# Altium PCB drivers_lvds.PcbDoc (part 1 of 2)
Units mil, origin at the board's own origin, x right, y up, seen from the top; angles counter-clockwise.
Board outline 2600 x 3200 mil, 2 copper layers (Top Layer, Bottom Layer); 42 components, 134 nets, 676 pads, 218 vias.
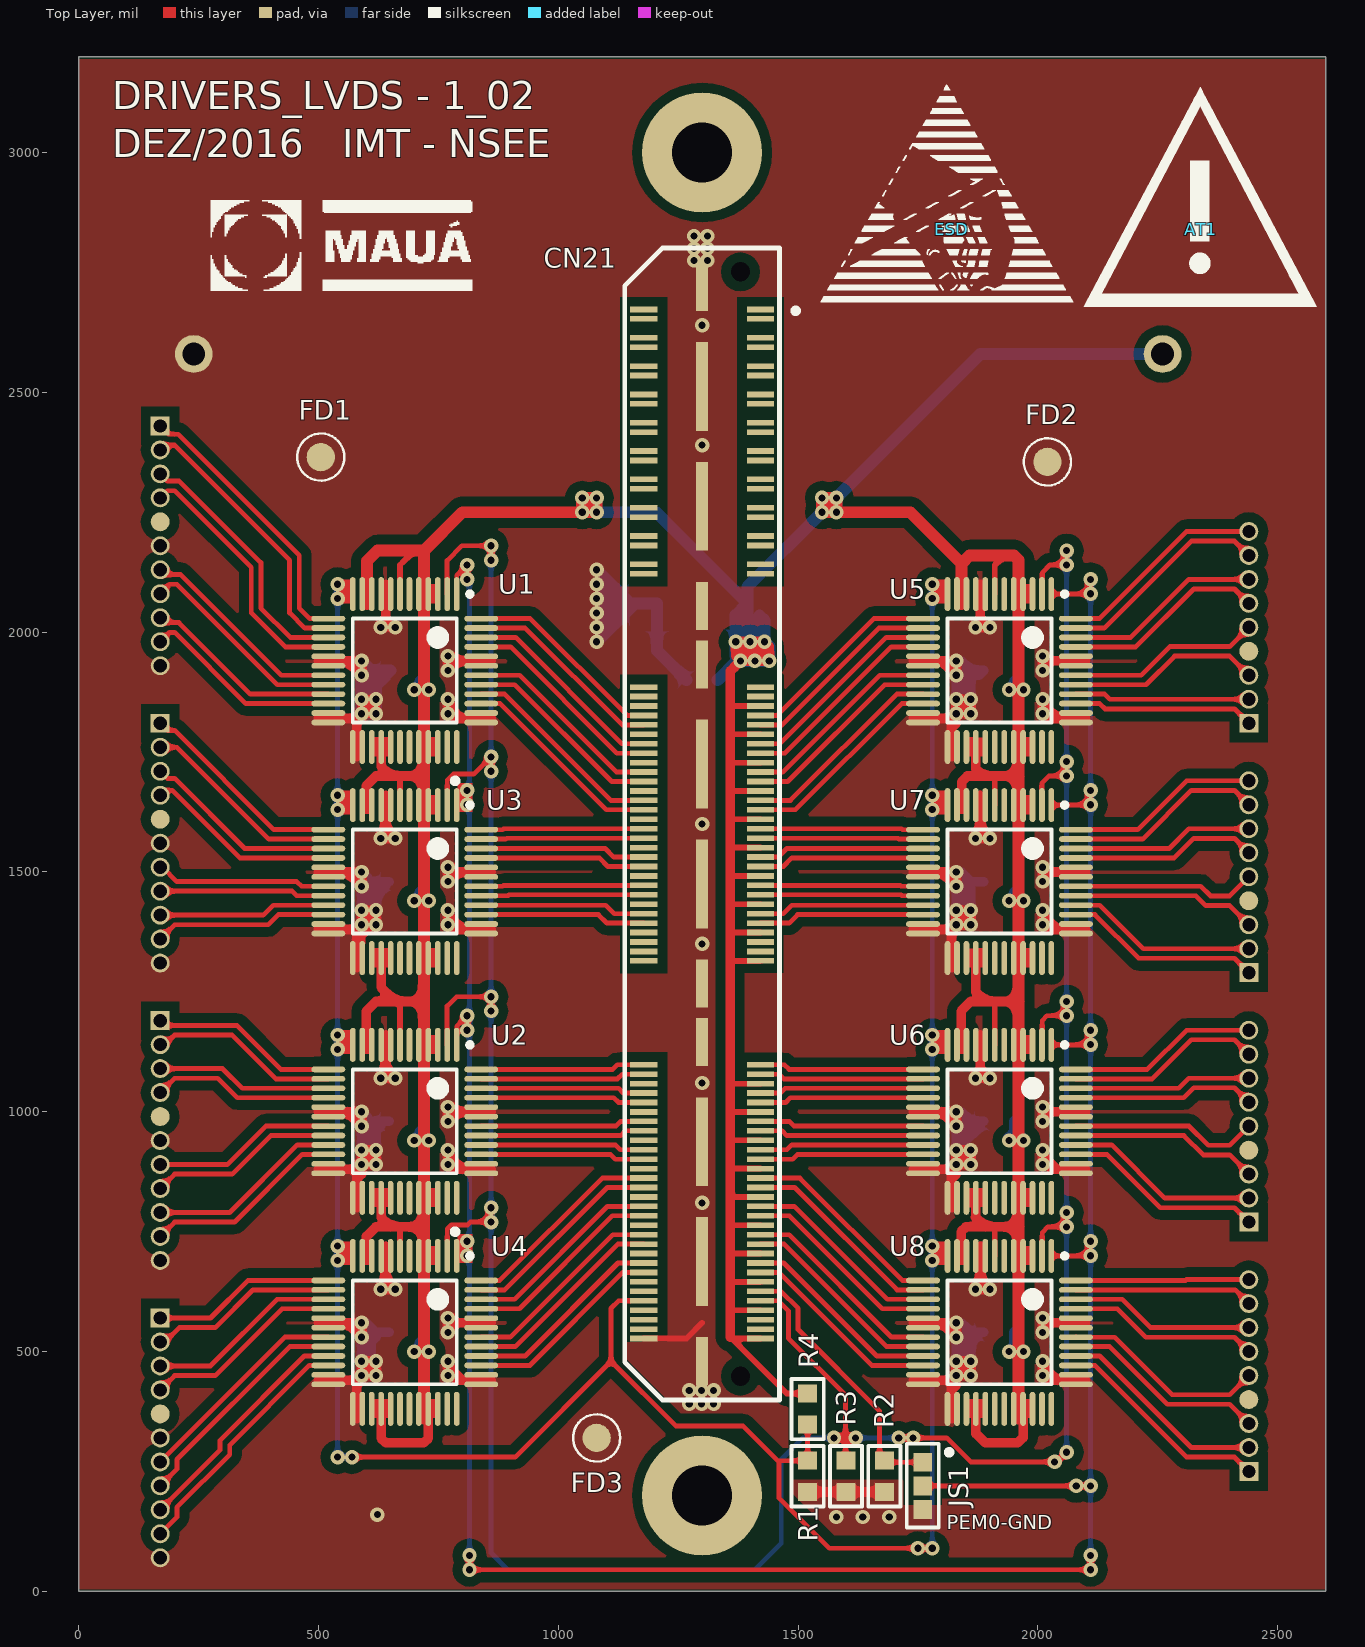
[diagram p0: Top Layer view]
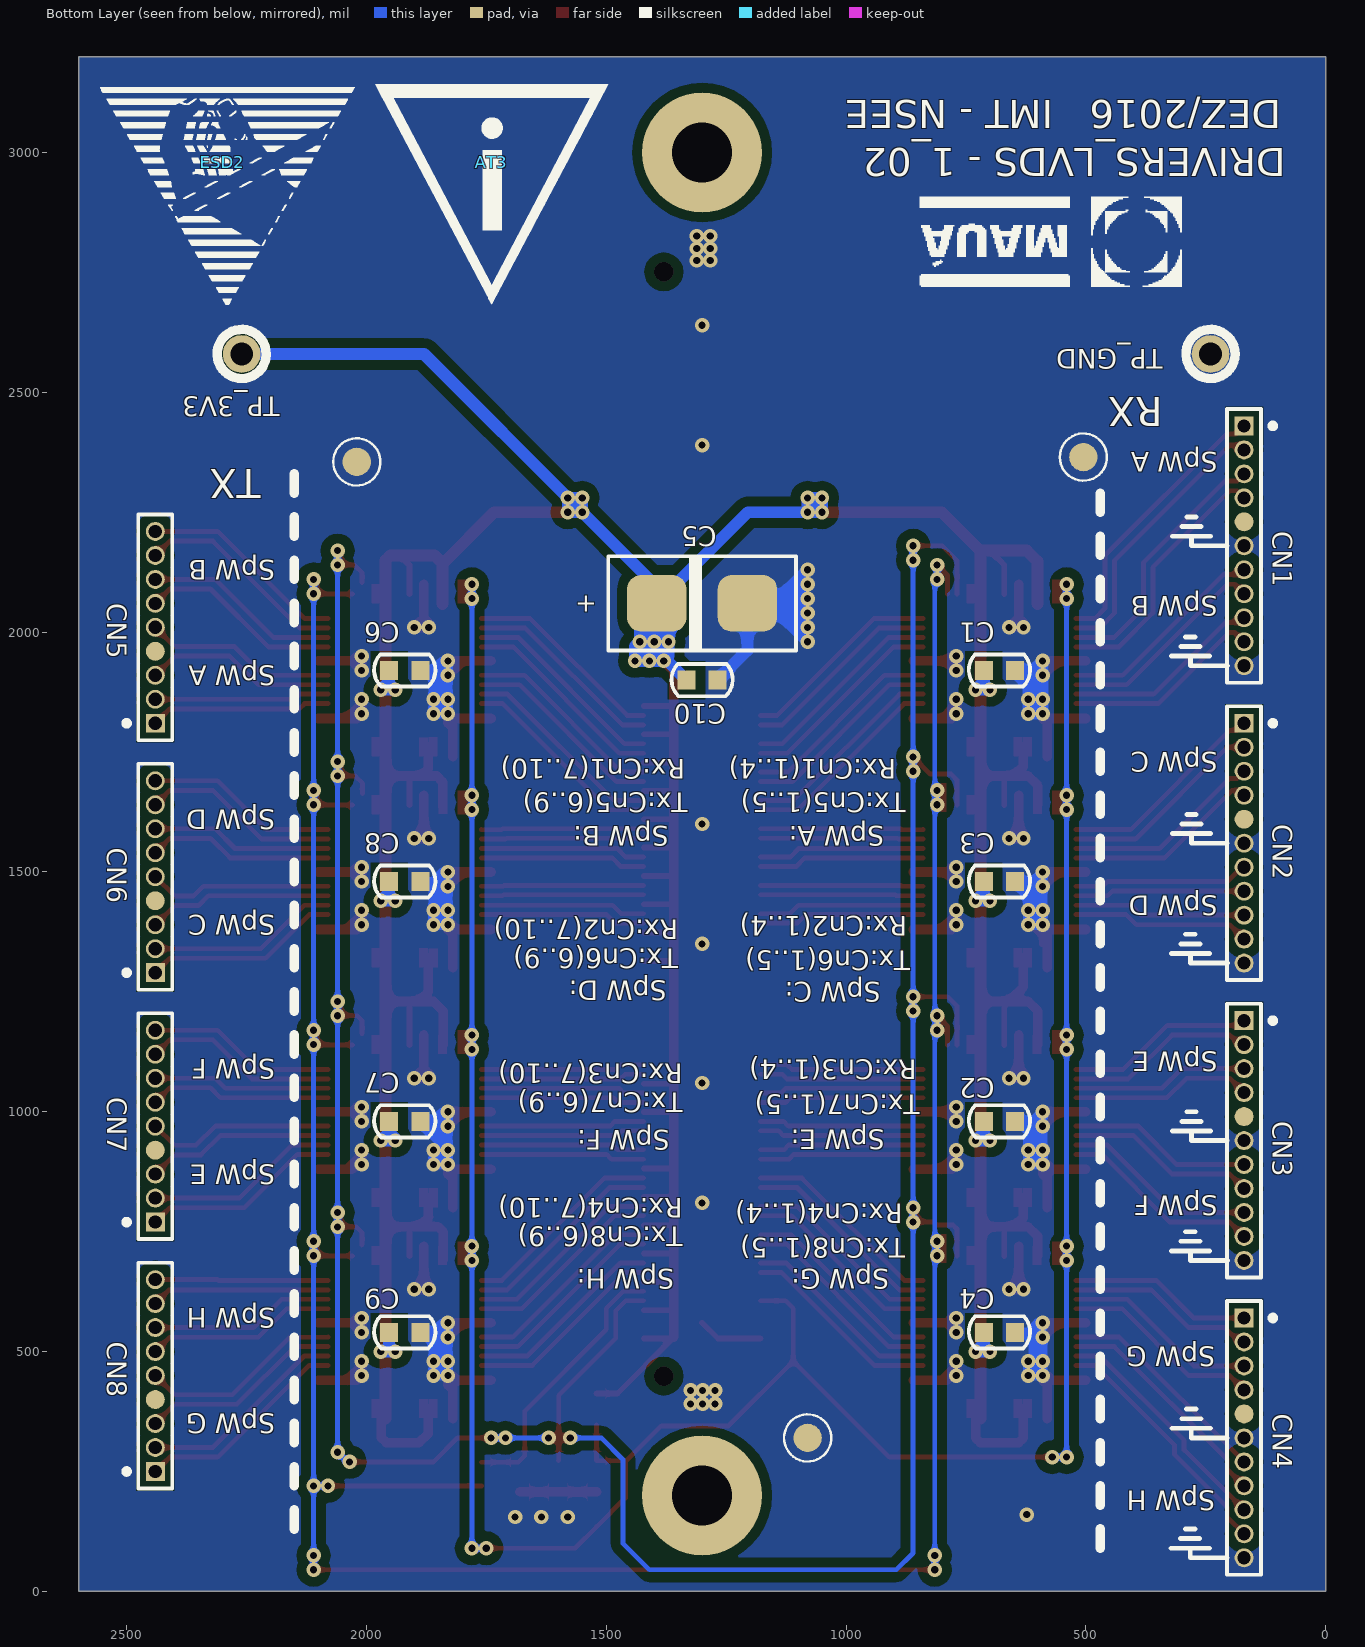
[diagram p1: Bottom Layer view, seen from below]

## Layer stack, top to bottom
Top Solder: solder mask 0.4, Solder Resist, Dk 3.5
Top Layer: signal copper 1.4
Dielectric1: core 12.6, FR-4, Dk 4.8
Bottom Layer: signal copper 1.4
Bottom Solder: solder mask 0.4, Solder Resist, Dk 3.5

## Board outline
0,0 2600,0 2600,3200 0,3200

## Design rules (kind name [scope] priority, off if disabled: settings)
Clearance Clearance_2 [InNamedPolygon('gnd_bottom')] p1: gap=20
Clearance Clearance_1 [InNamedPolygon('gnd_top')] p2: gap=20
Clearance clearance_drivers [((InComponent('JS1'))  Or  HasFootprint('VBC48A_N') Or InComponent('CN21')) Or IsTrack] p3: gap=7
Clearance [All] p4: gap=10
HoleSize [All] p1: absolutevalues=TRUE maxlimit=500 minlimit=0 maxpercent=80.000 minpercent=20.000
MinimumSolderMaskSliver [All] p1: minsoldermaskwidth=0
PolygonConnect PolygonConnect_3 [All vs IsNamedPolygon('gnd_bottom')] p1: connectstyle=Direct reliefconductorwidth=10 reliefentries=4 polygonreliefangle="90 Angle" airgapwidth=10
PolygonConnect PolygonConnect_2 [All vs IsNamedPolygon('gnd_top')] p2: connectstyle=Direct reliefconductorwidth=10 reliefentries=4 polygonreliefangle="90 Angle" airgapwidth=10
PolygonConnect PolygonConnect_1 [All vs IsNamedPolygon('gnd_top')] p3: connectstyle=Direct reliefconductorwidth=10 reliefentries=4 polygonreliefangle="90 Angle" airgapwidth=10
PolygonConnect [All] p4: connectstyle=Relief reliefconductorwidth=10 reliefentries=4 polygonreliefangle="90 Angle" airgapwidth=10
RoutingVias [All] p1: holewidth=15 width=30 viastyle="Through Hole" minholewidth=15 minwidth=30 maxholewidth=15 maxwidth=30
SilkToSilkClearance [All] p1: silktosilkclearance=5
SilkToSolderMaskClearance SilkscreenOverComponentPads [IsPad] p1: minsilkscreentomaskgap=0 clearancetoexposedcopper=TRUE
SolderMaskExpansion [All] p1: expansion=4
Width Width_alim [InNetClass(Alim)] p1: maxlimit=25 minlimit=12 preferedwidth=20
Width [All] p2: maxlimit=25 minlimit=10 preferedwidth=10
26 further rules are at their usual default settings.

## Classes and differential pairs
net class alim: +3V3 GND

## Components (designator, comment, footprint, x,y, rotation, side; value= is the part's Value field where it differs from the comment)
AT1 "##nl" LEIA_DOCUMENTACAO 2340,2840 r0 top
AT3 "##nl" LEIA_DOCUMENTACAO 1740,2980 r0 bottom (schematic designator AT1)
C1 "Capacitor Cerâmico SMD" "0603 - CAP - montagem na maquina" 680,1920 r0 bottom
C2 "Capacitor Cerâmico SMD" "0603 - CAP - montagem na maquina" 680,980 r0 bottom
C3 "Capacitor Cerâmico SMD" "0603 - CAP - montagem na maquina" 680,1480 r0 bottom
C4 "Capacitor Cerâmico SMD" "0603 - CAP - montagem na maquina" 680,540 r0 bottom
C5 "Capacitor de tântalo" CASE-B 1300,2060 r180 bottom
C6 "Capacitor Cerâmico SMD" "0603 - CAP - montagem na maquina" 1920,1920 r0 bottom
C7 "Capacitor Cerâmico SMD" "0603 - CAP - montagem na maquina" 1920,980 r0 bottom
C8 "Capacitor Cerâmico SMD" "0603 - CAP - montagem na maquina" 1920,1480 r0 bottom
C9 "Capacitor Cerâmico SMD" "0603 - CAP - montagem na maquina" 1920,540 r0 bottom
C10 "Capacitor Cerâmico SMD" "0603 - CAP - montagem na maquina" 1300,1900 r0 bottom
CN1 "MHDR1X11" MHDR1X11_Axonn 170,2430 r270 bottom
CN2 "MHDR1X11" MHDR1X11_Axonn 170,1810 r270 bottom
CN3 "MHDR1X11" MHDR1X11_Axonn 170,1190 r270 bottom
CN4 "MHDR1X11" MHDR1X11_Axonn 170,570 r270 bottom
CN5 "MHDR1X9" MHDR1X9_Axonn 2440,1810 r90 bottom
CN6 "MHDR1X9" MHDR1X9_Axonn 2440,1290 r90 bottom
CN7 "MHDR1X9" MHDR1X9_Axonn 2440,770 r90 bottom
CN8 "MHDR1X9" MHDR1X9_Axonn 2440,250 r90 bottom
CN21 "ASP-122952-01" ASP-122952-01 1300,1600 r270 top locked
ESD "##nl" ESTATICA 1820,2840 r0 top
ESD2 "##nl" ESTATICA 2300,2980 r0 bottom (schematic designator ESD)
fab1 "Comment" "TEXTO FABRICACAO" 1300,6040 r0 top
FD1 "##nl" FIDUCIAL 505,2365 r0 top
FD2 "##nl" FIDUCIAL 2020,2355 r0 top
FD3 "##nl" FIDUCIAL 1080,320 r0 top
JS1 "##Obs" "Jumper de solda 3 vias" 1760,220 r270 top
R1 "Res3" "0603 - MONTAGEM MÁQUINA" 1520,240 r90 top
R2 "Res3" "0603 - MONTAGEM MÁQUINA" 1680,240 r90 top
R3 "Res3" "0603 - MONTAGEM MÁQUINA" 1600,240 r90 top
R4 "Res3" "0603 - MONTAGEM MÁQUINA" 1520,380 r90 top
TP_3V3 "Comment" Testpoint 2260,2580 r180 bottom
TP_GND "Comment" Testpoint 240,2580 r180 bottom
U1 "DS90LV004TVS/NOPB" VBC48A_N 680,1920 r270 top
U2 "DS90LV004TVS/NOPB" VBC48A_N 680,980 r270 top
U3 "DS90LV004TVS/NOPB" VBC48A_N 680,1480 r270 top
U4 "DS90LV004TVS/NOPB" VBC48A_N 680,540 r270 top
U5 "DS90LV004TVS/NOPB" VBC48A_N 1920,1920 r270 top
U6 "DS90LV004TVS/NOPB" VBC48A_N 1920,980 r270 top
U7 "DS90LV004TVS/NOPB" VBC48A_N 1920,1480 r270 top
U8 "DS90LV004TVS/NOPB" VBC48A_N 1920,540 r270 top

## Footprints (in the part's own frame and the unit in brackets; to place one, negate y for a bottom-side part, rotate by r counter-clockwise, add the part's x,y. Pads: shape width x height; smd on the part's side, far side on the other; paste and mask are expansions set on the pad)
"0603 - CAP - montagem na maquina" [mm] "Chip Capacitor, 2-Leads, Body 1,6x0,8mm, IPC Medium Density"
  rect 0.95x1 smd: 1(-0.825,0) 2(0.825,0)
  silkscreen extent -1.62,-0.85 1.62,0.85, body extent -0.89,-0.48 0.89,0.48, height 0.6
"0603 - MONTAGEM MÁQUINA" [mm] "Chip Resistor, 2-Leads, Body 1,6x0,8mm, IPC Medium Density"
  rect 0.95x1 smd: 1(-0.825,0) 2(0.825,0)
  silkscreen extent -1.6,-0.85 1.6,0.85, body extent -0.89,-0.48 0.89,0.48, height 0.6
ASP-122952-01 [mm]
  rect 0.3x1.45 smd mask+0.05: 1(-27.25,3.09) 2(-27.25,-3.09) 3(-26.75,3.09) 4(-26.75,-3.09) 5(-25.75,3.09) 6(-25.75,-3.09) 7(-25.25,3.09) 8(-25.25,-3.09) 9(-24.25,3.09) 10(-24.25,-3.09) 11(-23.75,3.09) 12(-23.75,-3.09) 13(-22.75,3.09) 14(-22.75,-3.09) 15(-22.25,3.09) 16(-22.25,-3.09) 17(-21.25,3.09) 18(-21.25,-3.09) 19(-20.75,3.09) 20(-20.75,-3.09) 21(-19.75,3.09) 22(-19.75,-3.09) 23(-19.25,3.09) 24(-19.25,-3.09) 25(-18.25,3.09) 26(-18.25,-3.09) 27(-17.75,3.09) 28(-17.75,-3.09) 29(-16.75,3.09) 30(-16.75,-3.09) 31(-16.25,3.09) 32(-16.25,-3.09) 33(-15.25,3.09) 34(-15.25,-3.09) 35(-14.75,3.09) 36(-14.75,-3.09) 37(-13.75,3.09) 38(-13.75,-3.09) 39(-13.25,3.09) 40(-13.25,-3.09) 41(-7.25,3.09) 42(-7.25,-3.09) 43(-6.75,3.09) 44(-6.75,-3.09) 45(-6.25,3.09) 46(-6.25,-3.09) 47(-5.75,3.09) 48(-5.75,-3.09) 49(-5.25,3.09) 50(-5.25,-3.09) 51(-4.75,3.09) 52(-4.75,-3.09) 53(-4.25,3.09) 54(-4.25,-3.09) 55(-3.75,3.09) 56(-3.75,-3.09) 57(-3.25,3.09) 58(-3.25,-3.09) 59(-2.75,3.09) 60(-2.75,-3.09) 61(-2.25,3.09) 62(-2.25,-3.09) 63(-1.75,3.09) 64(-1.75,-3.09) 65(-1.25,3.09) 66(-1.25,-3.09) 67(-0.75,3.09) 68(-0.75,-3.09) 69(-0.25,3.09) 70(-0.25,-3.09) 71(0.25,3.09) 72(0.25,-3.09) 73(0.75,3.09) 74(0.75,-3.09) 75(1.25,3.09) 76(1.25,-3.09) 77(1.75,3.09) 78(1.75,-3.09) 79(2.25,3.09) 80(2.25,-3.09) 81(2.75,3.09) 82(2.75,-3.09) 83(3.25,3.09) 84(3.25,-3.09) 85(3.75,3.09) 86(3.75,-3.09) 87(4.25,3.09) 88(4.25,-3.09) 89(4.75,3.09) 90(4.75,-3.09) 91(5.25,3.09) 92(5.25,-3.09) 93(5.75,3.09) 94(5.75,-3.09) 95(6.25,3.09) 96(6.25,-3.09) 97(6.75,3.09) 98(6.75,-3.09) 99(7.25,3.09) 100(7.25,-3.09) 101(12.75,3.09) 102(12.75,-3.09) 103(13.25,3.09) 104(13.25,-3.09) 105(13.75,3.09) 106(13.75,-3.09) 107(14.25,3.09) 108(14.25,-3.09) 109(14.75,3.09) 110(14.75,-3.09) 111(15.25,3.09) 112(15.25,-3.09) 113(15.75,3.09) 114(15.75,-3.09) 115(16.25,3.09) 116(16.25,-3.09) 117(16.75,3.09) 118(16.75,-3.09) 119(17.25,3.09) 120(17.25,-3.09) 121(17.75,3.09) 122(17.75,-3.09) 123(18.25,3.09) 124(18.25,-3.09) 125(18.75,3.09) 126(18.75,-3.09) 127(19.25,3.09) 128(19.25,-3.09) 129(19.75,3.09) 130(19.75,-3.09) 131(20.25,3.09) 132(20.25,-3.09) 133(20.75,3.09) 134(20.75,-3.09) 135(21.25,3.09) 136(21.25,-3.09) 137(21.75,3.09) 138(21.75,-3.09) 139(22.25,3.09) 140(22.25,-3.09) 141(22.75,3.09) 142(22.75,-3.09) 143(23.25,3.09) 144(23.25,-3.09) 145(23.75,3.09) 146(23.75,-3.09) 147(24.25,3.09) 148(24.25,-3.09) 149(24.75,3.09) 150(24.75,-3.09) 151(25.25,3.09) 152(25.25,-3.09) 153(25.75,3.09) 154(25.75,-3.09) 155(26.25,3.09) 156(26.25,-3.09) 157(26.75,3.09) 158(26.75,-3.09) 159(27.25,3.09) 160(27.25,-3.09)
  rect 2.54x0.64 smd mask+0.05: G1(-28.445,0) G4(-11.555,0) G5(-8.445,0) G8(8.445,0) G9(11.555,0) G12(28.445,0)
  rect 4.7x0.64 smd mask+0.05: G2(-23.175,0) G3(-16.825,0) G6(-3.175,0) G7(3.175,0) G10(16.825,0) G11(23.175,0)
  round 0 hole 1.02 unplated: MH1(-29.24,2.03) MH2(29.24,2.03)
  silkscreen extent -30.5,-4.1 30.5,4.1
CASE-B [mm] "Capacitor de tântalo"
  rrect50% 3.15x3 smd mask+0.127: 1(-2.4,0) 2(2.4,0)
  silkscreen extent -4.97,-2.5 4.97,2.5, body extent -1.91,-1.55 1.91,1.55, height 2
ESTATICA [mil]
  silkscreen extent -277,-159 257,301
FIDUCIAL [mm]
  round 1.5 all layers, no hole paste+0 mask+0.4: 0(0,0)
  Top Layer pour cut-out: -0.686,1.041 -0.457,1.168 -0.279,1.219 -0.102,1.245 0.102,1.245 0.33,1.194 0.584,1.118 0.711,1.016 0.889,0.889 1.016,0.737 1.143,0.559 1.219,0.305 1.245,0.127 1.245,-0.152 1.219,-0.305 1.118,-0.584 0.889,-0.914 0.737,-1.016 0.559,-1.118 0.305,-1.219 0.102,-1.245 -0.178,-1.245 -0.432,-1.219 -0.737,-0.991 -0.889,-0.838 -1.143,-0.533 -1.194,-0.381 -1.27,-0.229 -1.27,0.025 -1.245,0.178 -1.168,0.457 -1.016,0.686 -0.914,0.864
  Bottom Layer pour cut-out: -0.686,1.041 -0.457,1.168 -0.279,1.219 -0.102,1.245 0.102,1.245 0.33,1.194 0.584,1.118 0.711,1.016 0.889,0.889 1.016,0.737 1.143,0.559 1.219,0.305 1.245,0.127 1.245,-0.152 1.219,-0.305 1.118,-0.584 0.889,-0.914 0.737,-1.016 0.559,-1.118 0.305,-1.219 0.102,-1.245 -0.178,-1.245 -0.432,-1.219 -0.737,-0.991 -0.889,-0.838 -1.143,-0.533 -1.194,-0.381 -1.27,-0.229 -1.27,0.025 -1.245,0.178 -1.168,0.457 -1.016,0.686 -0.914,0.864
  silkscreen extent -1.25,-1.25 1.25,1.25
"Jumper de solda 3 vias" [mm] "Jumper de solda 3 vias"
  rect 1x1 smd: 1(-1.25,0) 2(0,0) 3(1.25,0)
  silkscreen extent -2.22,-0.85 2.21,0.85
LEIA_DOCUMENTACAO [mil]
  silkscreen extent -244,-162 242,296
MHDR1X9_Axonn [mm] "Connector; Header; 9 Position"
  rect 1x1 hole 0.7: 1(0,0)
  round 1 hole 0.7: 2(1.27,0) 3(2.54,0) 5(5.08,0) 6(6.35,0) 7(7.62,0) 8(8.89,0) 9(10.16,0)
  round 1 all layers, no hole: 4(3.81,0)
  silkscreen extent -0.9,-0.9 11.06,0.9
MHDR1X11_Axonn [mm] "Connector; Header; 11 Position"
  rect 1x1 hole 0.7: 1(0,0)
  round 1 hole 0.7: 2(1.27,0) 3(2.54,0) 4(3.81,0) 6(6.35,0) 7(7.62,0) 8(8.89,0) 9(10.16,0) 10(11.43,0) 11(12.7,0)
  round 1 all layers, no hole: 5(5.08,0)
  silkscreen extent -0.9,-0.9 13.6,0.9
Testpoint [mm]
  round 2 hole 1.2: 1(0,0)
  silkscreen extent -1.3,-1.3 1.3,1.3
"TEXTO FABRICACAO" [mil]
VBC48A_N [mm] "Thin QFP, 48-Leads, Body 7x7mm, Pitch 0.5mm, IPC Medium Density"
  oval 1.8x0.3 smd: 1(-4.05,2.75) 2(-4.05,2.25) 3(-4.05,1.75) 4(-4.05,1.25) 5(-4.05,0.75) 6(-4.05,0.25) 7(-4.05,-0.25) 8(-4.05,-0.75) 9(-4.05,-1.25) 10(-4.05,-1.75) 11(-4.05,-2.25) 12(-4.05,-2.75) 25(4.05,-2.75) 26(4.05,-2.25) 27(4.05,-1.75) 28(4.05,-1.25) 29(4.05,-0.75) 30(4.05,-0.25) 31(4.05,0.25) 32(4.05,0.75) 33(4.05,1.25) 34(4.05,1.75) 35(4.05,2.25) 36(4.05,2.75)
  oval 0.3x1.8 smd: 13(-2.75,-4.05) 14(-2.25,-4.05) 15(-1.75,-4.05) 16(-1.25,-4.05) 17(-0.75,-4.05) 18(-0.25,-4.05) 19(0.25,-4.05) 20(0.75,-4.05) 21(1.25,-4.05) 22(1.75,-4.05) 23(2.25,-4.05) 24(2.75,-4.05) 37(2.75,4.05) 38(2.25,4.05) 39(1.75,4.05) 40(1.25,4.05) 41(0.75,4.05) 42(0.25,4.05) 43(-0.25,4.05) 44(-0.75,4.05) 45(-1.25,4.05) 46(-1.75,4.05) 47(-2.25,4.05) 48(-2.75,4.05)
  silkscreen extent -4.17,-2.75 2.75,3.58, body extent -3.5,-3.5 3.5,3.5, height 1.2

## Part data
AT1 AT3: library part ATENCAO, "ATENCAO"
CN1 CN2 CN3 CN4: "Header, 11-Pin"
CN5 CN6 CN7 CN8: "Header, 9-Pin"
CN21: "0.5MM PITCH DOUBLE ROW HS TERMINAL ASSEMBLY"
ESD ESD2: library part ESD, "ESD"
fab1: library part "Texto de fabricação"
FD1 FD2 FD3: library part Fiducial, "Fiducial"
JS1: library part "JUMPER SOLDA 3 VIAS", "JUMPER DE SOLDA 3 VIAS"
R1 R2 R3 R4: "Resistor"
TP_3V3 TP_GND: library part TESTPOINT, "Testpoint"
U1 U2 U3 U4 U5 U6 U7 U8: "4-Channel LVDS Buffer/Repeaters with Pre-Emphasis, 48-pin TQFP, Pb-Free"

## Free pads (board coordinates)
  round 250 hole 125: 0(1300,3000.04) 1(1300,199.96)

## Via types
v1: diameter 30, hole 15, Top Layer to Bottom Layer, tented both sides, 218 vias

## Nets (pads, with @x,y where several pads share a name; then routed paths per layer and width w, separated by ;. In a path a pad name is that pad's centre, name@x,y a point inside that pad or via, vN(x,y) a via of type N, cw(c..) or ccw(c..) an arc to the next point about the centre after c; other vN are vias at no path point)
+3V3: C1.2 C2.2 C3.2 C4.2 C5.1 C6.2 C7.2 C8.2 C9.2 C10.2 CN21.45 CN21.51 CN21.57 CN21.63 CN21.69 CN21.75 CN21.81 CN21.87 CN21.93 CN21.99 CN21.105 CN21.111 CN21.117 CN21.123 CN21.129 CN21.135 CN21.141 CN21.147 CN21.153 CN21.159 R4.2 TP_3V3.1 U1.3 U1.4 U1.5 U1.7 U1.10 U1.11 U1.27 U1.28 U1.29 U1.32 U1.33 U1.34 U2.3 U2.4 U2.5 U2.7 U2.10 U2.11 U2.27 U2.28 U2.29 U2.32 U2.33 U2.34 U3.3 U3.4 U3.5 U3.7 U3.10 U3.11 U3.27 U3.28 U3.29 U3.32 U3.33 U3.34 U4.3 U4.4 U4.5 U4.7 U4.10 U4.11 U4.27 U4.28 U4.29 U4.32 U4.33 U4.34 U5.3 U5.4 U5.5 U5.7 U5.10 U5.11 U5.27 U5.28 U5.29 U5.32 U5.33 U5.34 U6.3 U6.4 U6.5 U6.7 U6.10 U6.11 U6.27 U6.28 U6.29 U6.32 U6.33 U6.34 U7.3 U7.4 U7.5 U7.7 U7.10 U7.11 U7.27 U7.28 U7.29 U7.32 U7.33 U7.34 U8.3 U8.4 U8.5 U8.7 U8.10 U8.11 U8.27 U8.28 U8.29 U8.32 U8.33 U8.34 | length 15507.7
  Top Layer w12: 660,1230 670.16,1219.84 U2.7@670.16,1139.45 ; 670,760 670.16,759.84 U4.7@670.16,699.45 ; 670,1700 670.16,1699.84 U3.7@670.16,1639.45 ; U1.7@670.16,2079.45 670.16,2140.16 700,2170 720,2170 ; 1359,590 1362.78,586.22 CN21.153@1421.65,586.22 ; 1359,650 1363.72,645.28 CN21.147@1421.65,645.28 ; 1359,710 1364.67,704.33 CN21.141@1421.65,704.33 ; 1359,760 1362.39,763.39 CN21.135@1421.65,763.39 ; 1359,800 1359,804.88 ; 1359,810 1359,840 ; 1359,820 1361.44,822.44 CN21.129@1421.65,822.44 ; 1359,830 1366.56,822.44 CN21.129@1421.65,822.44 ; 1359,870 1359,880 1360.5,881.5 CN21.123@1421.65,881.5 ; 1359,940 1359.55,940.55 CN21.117@1421.65,940.55 ; 1359,1000 1359.39,999.61 CN21.111@1421.65,999.61 ; 1359,1310 1363.57,1314.57 CN21.99@1421.65,1314.57 ; 1359,1370 1362.62,1373.62 CN21.93@1421.65,1373.62 ; 1359,1430 1361.68,1432.68 CN21.87@1421.65,1432.68 ; 1359,1490 1360.73,1491.73 CN21.81@1421.65,1491.73 ; 1359,1550 1359.79,1550.79 CN21.75@1421.65,1550.79 ; 1359,1610 1359.16,1609.84 CN21.69@1421.65,1609.84 ; 1359,1670 1360.1,1668.9 CN21.63@1421.65,1668.9 ; 1359,1730 1361.05,1727.95 CN21.57@1421.65,1727.95 ; 1359,1790 1361.99,1787.01 CN21.51@1421.65,1787.01 ; 1359,1850 1362.94,1846.06 CN21.45@1421.65,1846.06 ; 1367.5,881.5 CN21.123@1421.65,881.5 ; 1367.66,1058.66 CN21.105@1421.65,1058.66 1370.34,1058.66 ; 1368.45,940.55 CN21.117@1421.65,940.55 ; 1368.61,999.61 CN21.111@1421.65,999.61 ; 1369.39,999.61 CN21.111@1421.65,999.61 ; 1369.55,940.55 CN21.117@1421.65,940.55 ; 1370.5,881.5 CN21.123@1421.65,881.5 ; 1371.44,822.44 CN21.129@1421.65,822.44 ; 1372.39,763.39 CN21.135@1421.65,763.39 ; 1372.78,586.22 CN21.153@1421.65,586.22 ; 1373.33,704.33 CN21.141@1421.65,704.33 ; 1373.72,645.28 CN21.147@1421.65,645.28 ; 1374.28,645.28 CN21.147@1421.65,645.28 ; 1374.67,704.33 CN21.141@1421.65,704.33 ; 1375.22,586.22 CN21.153@1421.65,586.22 ; 1375.61,763.39 CN21.135@1421.65,763.39 ; 1376.56,822.44 CN21.129@1421.65,822.44 ; 1377.5,881.5 CN21.123@1421.65,881.5 ; CN21.159@1421.65,527.17 1361.83,527.17 1359,530 1476.52,412.48 R4.2@1520,412.48 ; 1910,760 1910.16,759.84 U8.7@1910.16,699.45 ; 1910,1230 1910.16,1229.84 U6.7@1910.16,1139.45 ; U7.7@1910.16,1639.45 1910.16,1699.16 1911,1700 ; U5.7@1910.16,2079.45 1910.16,2139.84 1930.32,2160 1950,2160
  Top Layer w20: 600,700 600,740 620,760 650,760 ; 600,1140 600,1210 620,1230 660,1230 ; 600,1640 600,1680 620,1700 650,1700 ; U4.28@630.79,380.55 630.79,319.21 640,310 720,310 729.21,319.21 U4.33@729.21,380.55 ; U2.28@630.79,820.55 630.79,779.21 650,760 ; U3.28@630.79,1320.55 630.79,1259.21 660,1230 ; U1.28@630.79,1760.55 630.79,1719.21 650,1700 ; 720,760 650,760 ; 720,1230 660,1230 ; 720,1700 650,1700 ; 1359,530 1359,1919 v1(1380,1940) ; v1(1410,1940) v1@1440,1970 ; 1840,690 1840,750 1850,760 1890,760 ; 1840,1140 1840,1210 1860,1230 1890,1230 ; 1841,1636 1841,1688 1853,1700 1885,1700 ; U8.28@1870.79,380.55 1870.79,329.21 1890,310 1958.43,310 1969.21,320.79 U8.33@1969.21,380.55 ; U6.28@1870.79,820.55 1870.79,780.79 1870,780 1890,760 ; U7.28@1870.79,1320.55 1870.79,1249.21 1890,1230 ; U5.28@1870.79,1760.55 1870.79,1714.21 1885,1700 ; 1960,760 1890,760 ; 1960,1230 1890,1230 ; 1960,1700 1885,1700 ; v1(1380,1940) v1(1440,1940) v1@1440,1970 ; v1(1380,1940) 1400,1960 1380,1980 1380,1960 1400,1940 1400,1950 v1(1430,1980) ; v1(1380,1940) 1370,1950 v1(1370,1980) v1(1430,1980) ; v1(1430,1980) v1@1440,1970
  Top Layer w25: 601,2059 601,2148 623,2170 720,2170 ; v1(700,500) v1@720,500 ; v1(700,940) v1@720,940 ; v1(700,1440) v1@720,1440 ; v1(700,1880) v1@720,1880 ; 720,360 720,760 720,1230 720,1700 720,2170 ; v1@1570,2270 v1(1550,2250) ; 1841,2059 1841,2143 ; v1(1940,500) v1@1960,500 ; v1(1940,940) v1@1960,940 ; v1(1940,1440) v1@1960,1440 ; v1(1940,1880) v1@1960,1880 ; 1960,360 1960,760 1960,1230 1960,1700 1960,2150 1950,2160 1858,2160 1841,2143 ; 720,2170 800,2250 v1(1050,2250) ; v1(1050,2250) v1(1080,2250) ; v1(1050,2250) v1(1050,2280) ; v1(1050,2280) v1(1080,2280) v1(1080,2250) ; v1(1050,2280) v1(1080,2250) ; v1(1550,2250) v1(1550,2280) ; v1(1550,2250) v1(1580,2250) ; v1(1550,2250) v1(1550,2280) ; v1(1550,2280) v1(1580,2280) v1(1580,2250) ; v1(1580,2250) 1734,2250 1841,2143
  Bottom Layer w25: C10.2@1332.48,1900 1372.48,1940 v1(1440,1940) v1@1440,1970 ; v1(1380,1940) 1370,1950 1370,2035.51 1390,2055.51 1390,1990 v1(1400,1980) ; v1@1420,1980 1394.49,2005.51 C5.1@1394.49,2060 ; 1420,2000 1420,2034.49 1430,2024.49 v1(1430,1980) ; 1430,1960 v1@1440,1970 ; TP_3V3.1@2260,2580 1880,2580 v1(1550,2250) ; v1(1050,2280) v1(1050,2250) v1(1080,2250) ; v1(1050,2280) v1(1080,2280) v1(1080,2250) ; v1(1050,2280) v1(1080,2250) ; v1(1080,2250) 1204.49,2250 C5.1@1394.49,2060 ; C5.1@1394.49,2060 1394.49,2094.49 v1(1550,2250) ; v1(1430,1980) 1410,1960 v1(1410,1940) v1(1370,1980) v1(1430,1980) ; v1(1430,1980) v1@1440,1970 ; v1(1550,2250) v1(1580,2250) ; v1(1550,2250) v1(1580,2250) ; v1(1550,2250) v1(1550,2280) v1(1580,2280) ; v1(1550,2250) v1(1580,2280) ; v1(1580,2250) v1(1580,2280) ; v1(1580,2250) v1(1580,2280) ; 1952.48,512.48 C9.2@1952.48,540 1952.48,512.48 ; 1952.48,512.48 1964.96,500 v1(1970,500) v1(1940,500) 1952.48,512.48 ; 1952.48,957.52 v1(1970,940) v1(1940,940) 1940,945.04 1952.48,957.52 ; 1952.48,957.52 C7.2@1952.48,980 1952.48,957.52 ; v1(700,500) v1(730,500) 712.48,517.52 712.48,512.48 v1(700,500) ; v1(700,940) v1(730,940) 712.48,957.52 712.48,952.48 v1(700,940) ; v1(700,1440) v1(730,1440) 712.48,1457.52 712.48,1452.48 v1(700,1440) ; v1(700,1880) v1(730,1880) 712.48,1897.52 712.48,1892.48 v1(700,1880) ; v1(1940,1440) v1(1970,1440) 1952.48,1457.52 1952.48,1452.48 v1(1940,1440) ; v1(1940,1880) v1(1970,1880) 1952.48,1897.52 1952.48,1892.48 v1(1940,1880)
\PWDN: CN21.152 R1.2 R4.1 U1.12 U2.12 U3.12 U4.12 U5.12 U6.12 U7.12 U8.12 | length 5722.8
  Top Layer w10: v1(570,280) 910,280 1110,480 ; CN21.152@1178.35,605.91 1125.91,605.91 1110,590 1110,480 ; 1457.52,272.48 1471,272.48 ; R4.1@1520,347.52 R1.2@1520,272.48 1471,272.48 ; v1(1780,90) 1565,90 1520,135 1460,195 1460,247 1460,270 ; 1110,480 1245,345 1385,345 1460,270 ; 1460,270 1462.48,272.48 1471,272.48
  Bottom Layer w10: v1(540,2100) v1(540,280) v1(570,280) ; v1(1750,90) v1(1780,90) v1(1780,2100)
  other v1: 540,690 1780,690 540,720 1780,720 540,1130 1780,1130 540,1160 1780,1160 540,1630 1780,1630 540,1660 1780,1660 540,2070 1780,2070
GND: C1.1 C2.1 C3.1 C4.1 C5.2 C6.1 C7.1 C8.1 C9.1 C10.1 CN1.6 CN1.11 CN2.6 CN2.11 CN3.6 CN3.11 CN4.6 CN4.11 CN21.160 CN21.G1 CN21.G2 CN21.G3 CN21.G4 CN21.G5 CN21.G6 CN21.G7 CN21.G8 CN21.G9 CN21.G10 CN21.G11 CN21.G12 FD1.0 FD2.0 FD3.0 JS1.3 R1.1 R2.1 R3.1 TP_GND.1 U1.8 U1.9 U1.17 U1.18 U1.23 U1.24 U1.25 U1.26 U1.37 U1.38 U1.43 U1.44 U2.8 U2.9 U2.17 U2.18 U2.23 U2.24 U2.25 U2.26 U2.37 U2.38 U2.43 U2.44 U3.8 U3.9 U3.17 U3.18 U3.23 U3.24 U3.25 U3.26 U3.37 U3.38 U3.43 U3.44 U4.8 U4.9 U4.17 U4.18 U4.23 U4.24 U4.25 U4.26 U4.37 U4.38 U4.43 U4.44 U5.8 U5.9 U5.17 U5.18 U5.23 U5.24 U5.25 U5.26 U5.37 U5.38 U5.43 U5.44 U6.8 U6.9 U6.17 U6.18 U6.23 U6.24 U6.25 U6.26 U6.37 U6.38 U6.43 U6.44 U7.8 U7.9 U7.17 U7.18 U7.23 U7.24 U7.25 U7.26 U7.37 U7.38 U7.43 U7.44 U8.8 U8.9 U8.17 U8.18 U8.23 U8.24 U8.25 U8.26 U8.37 U8.38 U8.43 U8.44 | length 14606.6
  Top Layer w12: CN21.160@1178.35,527.17 1252.95,527.17 1267.17,527.17 1300,560
  Top Layer w15: U3.26@590,1350 v1(590,1390) ; v1@590,1820 v1(590,1830) ; v1(590,1830) v1(590,1860) v1(620,1860) ; v1(590,1830) v1(620,1830) v1(620,1860) ; v1(590,1830) v1(620,1860) ; v1(630,2010) v1(660,2010) v1(630,2010)
  Top Layer w20: 500,440 570,440 580,450 v1(620,450) ; 500,560 560,560 ; 500,880 570,880 ; 500,1000 v1(590,1000) v1(590,970) ; 500,1380 v1@580,1380 ; 500,1500 v1(590,1500) v1(590,1470) ; 500,1820 580,1820 v1(590,1830) ; 500,1940 v1(590,1940) v1(590,1910) 560,1940 520,1940 ; 520,560 560,560 ; 520,1000 560,1000 ; 520,1500 560,1500 ; 580,360 580,430 590,440 v1(590,450) ; 580,800 580,860 ; 580,1300 580,1360 ; 580,1740 580,1810 v1@590,1820 ; v1(630,2010) 630,2020 640,2030 ; 640,720 640,650 ; 640,1160 640,1110 ; 640,1660 640,1590 ; 640,2040 640,2030 ; 640,2100 640,2030 ; v1(660,2010) 640,2030 ; 820,560 790,560 ; 820,1380 800,1380 770,1410 v1(770,1420) v1(770,1390) 780,1380 860,1380 ; 860,440 800,440 ; 860,560 790,560 ; 860,880 800,880 ; 860,1000 790,1000 ; 860,1500 790,1500 ; 860,1820 810,1820 ; 860,1940 790,1940 ; R1.1@1520,207.52 R3.1@1600,207.52 ; R3.1@1592.48,207.52 R3.1@1600,207.52 ; R2.1@1680,207.52 R3.1@1600,207.52 ; 1740,440 1810,440 ; 1740,560 1800,560 ; 1740,880 v1@1820,880 ; 1740,1000 v1(1830,1000) v1(1830,970) 1800,1000 ; 1740,1380 1810,1380 1820,1390 v1(1860,1390) ; 1740,1500 1800,1500 ; 1740,1820 v1@1820,1820 ; 1740,1940 v1(1830,1940) v1(1830,1910) ; 1790,1940 1800,1940 v1(1830,1910) ; 1810,1940 1830,1920 v1(1830,1910) ; 1820,360 1820,420 ; 1820,800 1820,860 ; 1820,1300 1820,1370 1830,1380 v1(1830,1390) ; 1820,1740 1820,1800 ; 1880,720 1880,650 ; 1880,1160 1880,1090 ; 1880,1660 1880,1590 ; 1880,2100 1880,2030 ; 2040,560 2080,560 ; 2040,1000 2080,1000 ; 2040,1500 2080,1500 ; 2040,1820 2010,1850 v1(2010,1860) v1(2010,1830) 2020,1820 2100,1820 ; 2040,1940 2080,1940 ; 2050,440 2040,440 2010,470 v1(2010,480) v1(2010,450) 2020,440 2100,440 ; 2050,880 2040,880 2010,910 v1(2010,920) v1(2010,890) 2020,890 2030,880 2100,880 ; 2050,1380 2040,1380 2010,1410 v1(2010,1420) v1(2010,1390) 2020,1380 2100,1380 ; 2100,560 2030,560 ; 2100,1000 2030,1000 ; 2100,1500 2030,1500 ; 2100,1940 2030,1940 ; 560,560 v1(590,560) v1(590,530) 560,560 ; 560,1000 570,1000 590,980 v1(590,970) ; 560,1000 v1(590,970) ; 560,1500 570,1500 590,1480 v1(590,1470) ; 560,1500 v1(590,1470) ; 570,880 580,890 v1(620,890) ; 570,880 580,870 580,860 ; 580,860 590,870 v1(590,890) ; 580,1360 v1@580,1380 ; 580,1360 610,1390 v1(620,1390) ; v1@580,1380 v1(620,1420) ; v1@580,1380 v1(590,1390) ; v1(590,450) v1(620,450) ; v1(590,450) v1(590,480) ; v1(590,480) v1(620,480) v1(620,450) ; v1(590,480) v1(620,450) ; v1(590,890) v1(620,890) ; v1(590,890) v1(590,920) ; v1(590,920) v1(620,920) v1(620,890) ; v1(590,920) v1(620,890) ; v1(590,1390) v1(590,1420) v1(620,1420) ; v1(590,1390) v1(620,1390) ; v1(620,1390) v1(620,1420) ; v1(630,630) v1(660,630) 640,650 ; v1(630,630) 640,640 640,650 ; v1(630,630) 630,640 640,650 ; v1(630,1070) v1(660,1070) 640,1090 ; v1(630,1070) v1@640,1080 ; v1(630,1070) v1@640,1080 ; v1(630,1070) 630,1080 640,1090 ; v1@640,1080 640,1110 ; v1@640,1080 640,1110 ; 640,1090 640,1110 ; 640,1590 v1(660,1570) v1(630,1570) 630,1580 640,1590 ; v1(770,1010) v1(770,980) 790,1000 ; v1(770,1010) 780,1000 790,1000 ; v1(770,1010) 780,1010 790,1000 ; v1(770,1510) v1(770,1480) 790,1500 ; v1(770,1510) v1@780,1500 ; v1(770,1510) 780,1510 v1@780,1500 ; v1(770,1830) v1(770,1860) ; v1(770,1830) v1@780,1830 ; v1(770,1830) v1@780,1830 ; v1(770,1830) 780,1820 810,1820 ; v1(770,1860) 770,1840 790,1820 ; v1(770,1860) 790,1820 ; v1@780,1500 790,1500 ; v1@780,1830 790,1820 ; 790,560 v1(770,540) v1(770,570) 780,570 790,560 ; 790,1820 810,1820 ; 790,1940 v1(770,1920) v1(770,1950) 780,1950 790,1940 ; 800,440 790,440 780,450 v1(770,450) v1(770,480) 770,470 800,440 ; 800,880 780,880 v1(770,890) v1(770,920) 770,910 800,880 ; 1800,560 v1(1830,560) v1(1830,530) 1800,560 ; 1800,1500 v1(1830,1500) v1(1830,1470) 1800,1500 ; 1810,440 1820,450 v1(1830,450) ; 1810,440 1820,430 1820,420 ; 1820,420 1830,430 v1(1830,450) ; 1820,860 1830,870 v1(1830,890) ; 1820,860 v1@1820,880 ; v1@1820,880 v1(1830,890) ; 1820,1800 1830,1810 v1(1830,1830) ; 1820,1800 v1@1820,1820 ; v1@1820,1820 v1(1830,1830) ; v1(1830,450) v1(1830,480) ; v1(1830,450) v1(1860,450) ; v1(1830,480) v1(1860,480) v1(1860,450) ; v1(1830,480) v1(1860,450) ; v1(1830,890) v1(1860,890) ; v1(1830,890) v1(1830,920) ; v1(1830,890) v1(1860,890) ; v1(1830,920) v1(1860,920) v1(1860,890) ; v1(1830,920) v1(1860,890) ; v1(1830,1390) v1(1860,1390) ; v1(1830,1390) v1(1830,1420) ; v1(1830,1420) v1(1860,1420) v1(1860,1390) ; v1(1830,1420) v1(1860,1390) ; v1(1830,1830) v1(1860,1830) ; v1(1830,1830) v1(1830,1860) ; v1(1830,1830) v1(1860,1830) ; v1(1830,1860) v1(1860,1860) v1(1860,1830) ; v1(1830,1860) v1(1860,1830) ; v1(1870,630) v1(1900,630) 1880,650 ; v1(1870,630) 1880,640 1880,650 ; v1(1870,630) 1870,640 1880,650 ; 1880,1090 1870,1080 v1(1870,1070) v1(1900,1070) 1880,1090 ; 1880,1590 v1(1900,1570) v1(1870,1570) 1870,1580 1880,1590 ; 1880,2030 1870,2020 v1(1870,2010) v1(1900,2010) 1880,2030 ; v1(2010,1010) v1(2010,980) 2030,1000 ; v1(2010,1010) v1@2020,1000 ; v1(2010,1010) v1@2020,1000 ; v1(2010,1010) 2020,1010 2030,1000 ; v1(2010,1510) v1(2010,1480) 2030,1500 ; v1(2010,1510) 2020,1500 2030,1500 ; v1(2010,1510) 2020,1510 2030,1500 ; v1@2020,1000 2030,1000 ; 2030,560 v1(2010,540) v1(2010,570) 2020,570 2030,560 ; 2030,1940 v1(2010,1920) v1(2010,1950) 2020,1950 2030,1940
  Bottom Layer w20: 610,1460 600,1460 v1(590,1470) ; 620,530 610,520 610,460 v1(590,480) v1(620,480) v1(620,450) v1(590,450) 590,520 610,540 v1(590,560) 590,550 600,560 620,540 C4.1@647.52,540 ; C2.1@647.52,980 610,980 v1(590,1000) v1(590,920) ; C3.1@647.52,1480 610,1480 v1(590,1500) v1(590,1470) ; v1@1840,1920 v1(1830,1910) ; 1850,960 1840,950 1830,960 v1(1830,970) ; C9.1@1875.32,540 1875.02,539.69 1875.02,535.02 1850,510 ; C9.1@1887.52,540 1860,540 1840,560 1830,550 v1(1830,530) ; C7.1@1887.52,980 1860,980 1840,1000 1830,990 v1(1830,970) ; C8.1@1887.52,1480 1860,1480 1840,1500 1830,1490 v1(1830,1500) 1850,1480 1830,1460 v1(1830,1390) v1(1860,1390) ; v1(590,890) v1(590,920) ; v1(590,890) v1(620,890) v1(620,920) ; v1(590,890) v1(620,920) ; v1(590,920) v1(620,920) ; v1(590,920) 610,940 610,950 v1(590,970) 630,970 620,960 v1(620,920) ; v1(590,1390) v1(590,1420) ; v1(590,1390) v1(620,1390) v1(620,1420) ; v1(590,1390) v1(620,1420) ; v1(590,1420) v1(620,1420) ; v1(590,1420) 620,1450 ; v1(590,1470) 640,1470 620,1450 ; v1(590,1470) 590,1430 620,1460 620,1450 ; v1(620,1420) 620,1450 ; v1(1830,530) 1870,530 1880,540 1840,540 v1(1830,530) ; v1(1830,530) v1(1830,450) v1(1860,450) v1(1860,480) ; v1(1830,920) v1(1860,920) v1(1860,890) ; v1(1830,920) 1880,970 v1(1830,970) ; v1(1830,920) v1(1860,890) ; v1(1830,970) 1840,980 1880,980 1870,970 v1(1830,970) ; v1(1830,970) v1(1830,890) v1(1860,890) ; v1(1830,1420) v1(1860,1420) v1(1860,1390) ; v1(1830,1420) v1(1860,1390) ; v1(1830,1420) 1840,1430 1850,1430 1850,1460 1860,1470 v1(1860,1390) ; v1(1830,1860) v1(1860,1860) ; v1(1830,1860) v1(1860,1830) ; v1(1830,1860) 1850,1880 1860,1880 v1(1830,1910) ; v1(1830,1910) v1(1830,1940) 1840,1940 1860,1920 ; v1(1830,1910) 1877.52,1910 C6.1@1887.52,1920 1860,1920 ; v1(1830,1910) v1(1830,1830) v1(1860,1830) ; 1850,510 1850,460 v1(1830,480) v1(1860,480) ; 1850,510 1850,520 1860,530 v1(1860,480) ; v1(1860,1830) v1(1860,1860) ; v1(1860,1860) 1860,1920
  Bottom Layer w25: 600,1880 620,1880 v1(590,1910) ; C1.1@647.52,1920 637.52,1910 v1(590,1910) ; v1(1080,1980) 1160,2060 C5.2@1205.51,2060 ; v1(1080,2010) 1130,2060 C5.2@1205.51,2060 ; v1(1080,2040) 1100,2060 C5.2@1205.51,2060 ; v1(1080,2070) 1090,2060 C5.2@1205.51,2060 ; v1(1080,2100) 1120,2060 C5.2@1205.51,2060 ; v1(1080,2130) 1150,2060 C5.2@1205.51,2060 ; C10.1@1267.52,1900 1205.51,1962.01 C5.2@1205.51,2060 ; v1(590,1830) v1(590,1860) ; v1(590,1830) v1(620,1830) v1(620,1860) ; v1(590,1830) v1(620,1860) ; v1(590,1860) v1(620,1860) ; v1(590,1860) v1(590,1910) ; v1(590,1910) v1(590,1940) 610,1920 650,1920 620,1890 v1(620,1860)
  other v1: 1580,155 1635,155 1690,155 623,160 1273,391 1299,391 1324,391 1273,419 1299,419 1324,419 1300,810 1300,1060 1300,1350 1300,1600 1300,2390 1300,2640 1283,2775 1311,2775 1283,2800 1311,2800 1283,2826 1311,2826